# Altium PCB Arduino MEGA blank shield.pcbdoc
Units mm, origin at the board's own origin, x right, y up, seen from the top; angles counter-clockwise.
Board outline 101.6 x 53.34 mm, 2 copper layers (Top Layer, Bottom Layer); 30 components, 91 nets, 145 pads, 2 vias.
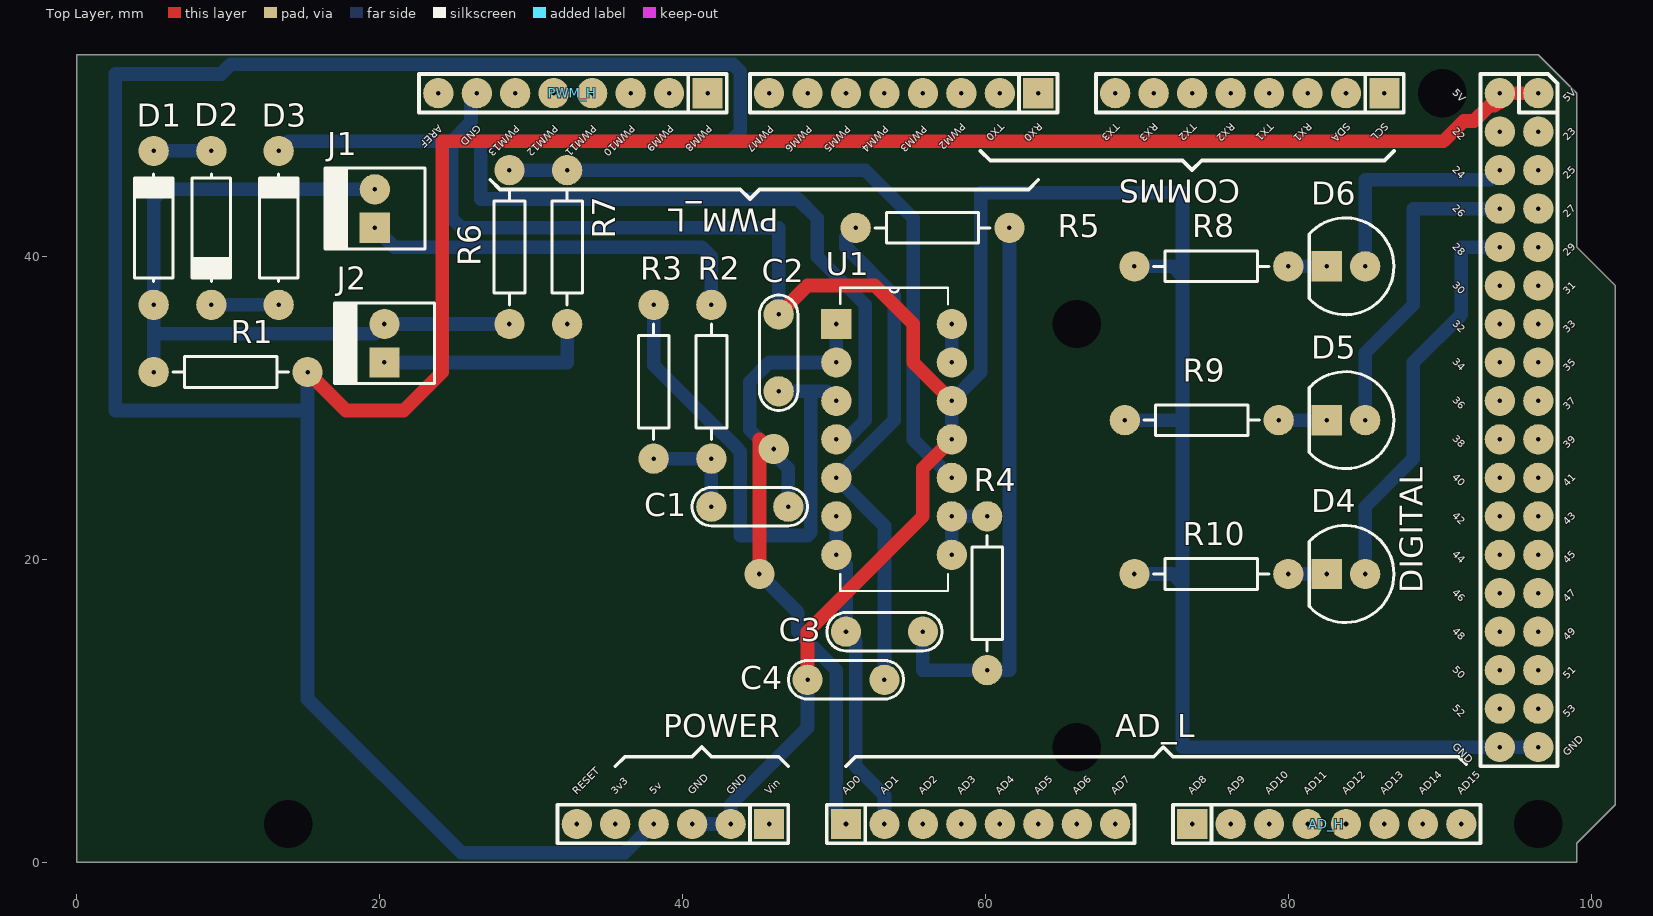
[diagram p0: Top Layer view]
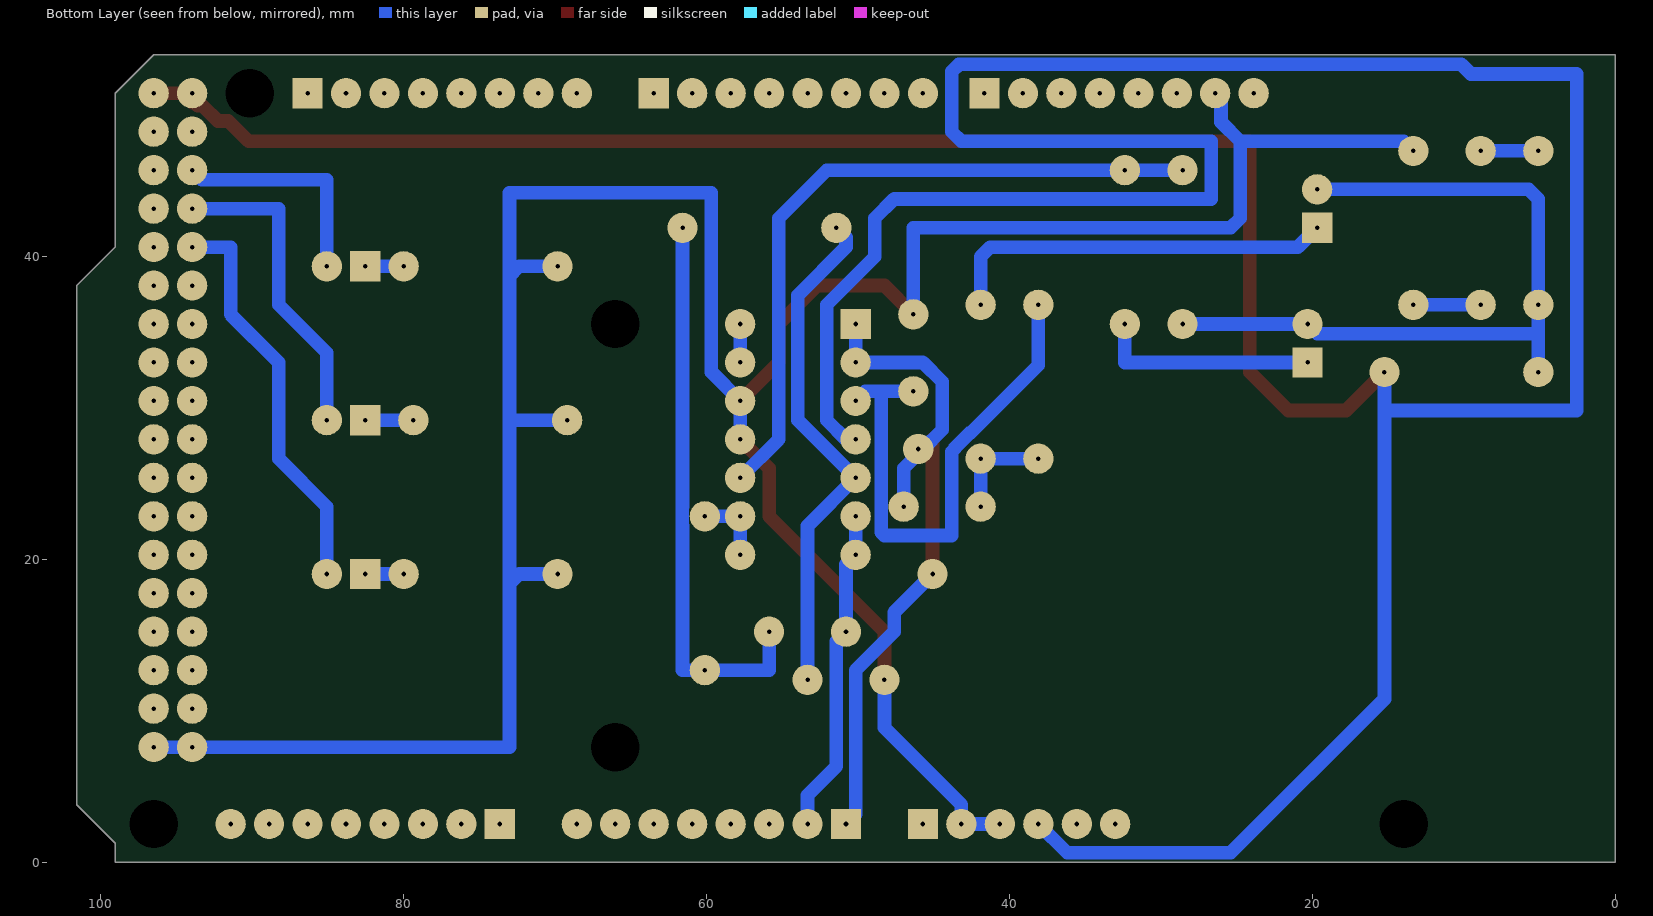
[diagram p1: Bottom Layer view, seen from below]
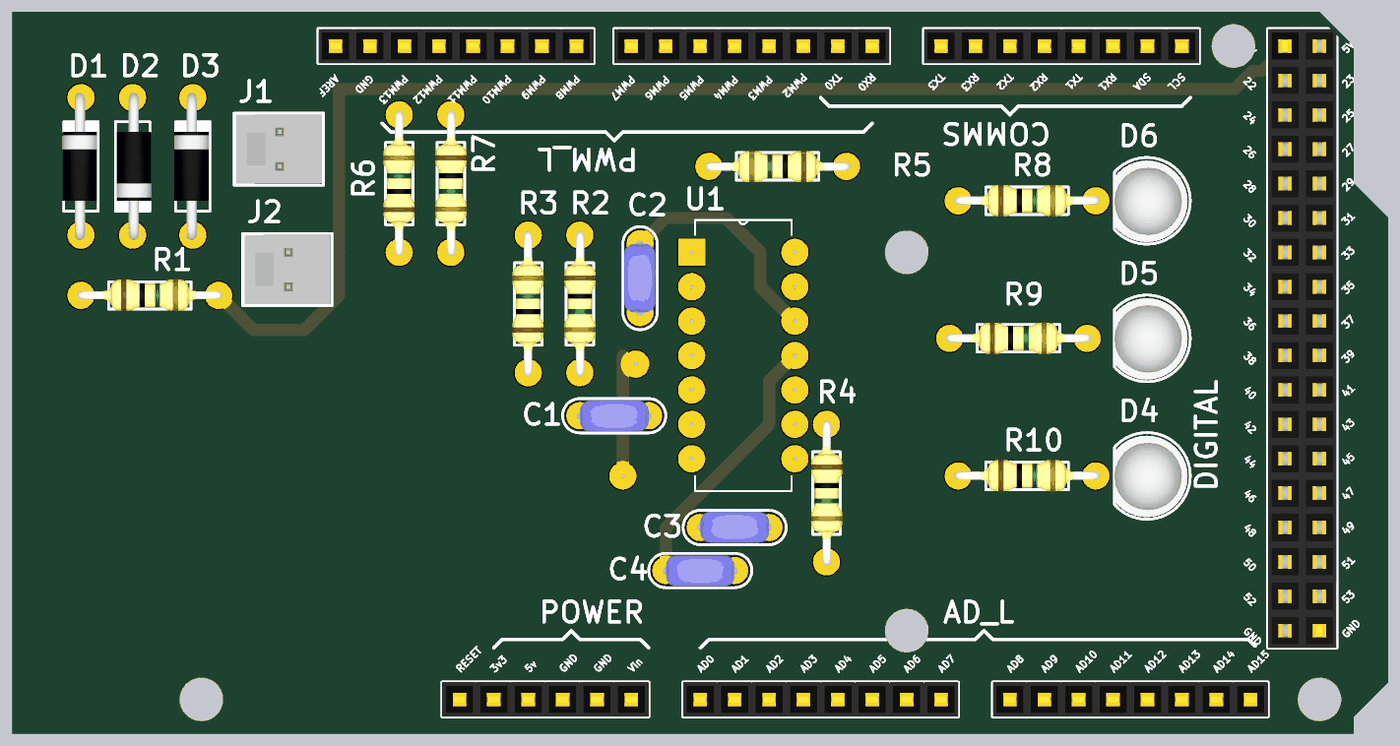
[diagram p2: 3D render of the assembled board from above, using the file's embedded part models]

## Layer stack, top to bottom
Top Solder: solder mask 0.0102, Solder Resist, Dk 3.5
Top Layer: signal copper 0.0356
Dielectric1: dielectric 0.32, FR-4, Dk 4.8
Bottom Layer: signal copper 0.0356
Bottom Solder: solder mask 0.0102, Solder Resist, Dk 3.5

## Board outline
0,0 0,53.34 96.52,53.34 99.06,50.8 99.06,40.64 101.6,38.1 101.6,3.81 99.06,1.27 99.06,0

## Design rules (kind name [scope] priority, off if disabled: settings)
Clearance [All] p1: gap=0.254 ignorepadtopadclearanceinfootprint=FALSE except(0: Arc-Hole Track-Hole SMDPad-Hole THPad-Hole Via-Hole Fill-Hole Poly-Hole Region-Hole Text-Hole)
PolygonConnect [All] p1: connectstyle=Relief reliefconductorwidth=0.254 reliefentries=4 polygonreliefangle="90 Angle" airgapwidth=0.254
RoutingVias [All] p1: holewidth=0.711 width=1.27 viastyle="Through Hole" minholewidth=0.711 minwidth=1.27 maxholewidth=0.711 maxwidth=1.27
SilkToSolderMaskClearance SilkscreenOverComponentPads [IsPad] p1: minsilkscreentomaskgap=0.254 clearancetoexposedcopper=TRUE
SolderMaskExpansion [All] p1: expansion=0.102
Width [All] p1: maxlimit=0.9 minlimit=0.9 preferedwidth=0.9
29 further rules are at their usual default settings.

## Components (designator, comment, footprint, x,y, rotation, side; value= is the part's Value field where it differs from the comment)
AD_H "AD_H" "Header 8x1 8.5mm" 73.66,2.54 r0 top locked
AD_L "AD_L" "Header 8x1 8.5mm" 50.8,2.54 r0 top locked
C1 "220n" CAP200 44.45,23.495 r0 top
C2 "22n" CAP200 46.355,33.655 r270 top
C3 "220n" CAP200 53.34,15.24 r180 top
C4 "22n" CAP200 50.8,12.065 r0 top
COMMS "Communication" "Header 8x1 8.5mm" 86.36,50.8 r180 top
D1 "1n4007" DO41 5.08,41.91 r90 top
D2 "1n4007" DO41 8.89,41.91 r270 top
D3 "1n4007" DO41 13.335,41.91 r90 top
D4 "LED" LED5 83.82,19.05 r180 top
D5 "LED" LED5 83.82,29.21 r180 top
D6 "LED" LED5 83.82,39.37 r180 top
DIGITAL "IO_36" "HEADER 36X 8MM" 96.52,50.8 r270 top locked
J1 "corriente" MOLEX2 19.685,41.91 r90 top
J2 "tension" MOLEX2 20.32,33.02 r90 top
POWER "POWER" "Header 6x1 8.5mm" 45.72,2.54 r180 top locked
PWM_H "PWM_H" "Header 8x1 8.5mm" 41.656,50.8 r180 top locked
PWM_L "PWM_L" "Header 8x1 8.5mm" 63.5,50.8 r180 top locked
R1 "680" RES400 5.08,32.385 r0 top
R2 "1.2k" RES400 41.91,36.83 r270 top
R3 "18k" RES400 38.1,26.67 r90 top
R4 "1.2k" RES400 60.122,22.86 r270 top
R5 "18k" RES400 61.595,41.91 r180 top
R6 "RES" RES400 28.575,35.56 r90 top
R7 "RES" RES400 32.385,45.72 r270 top
R8 "220" RES400 69.85,39.37 r0 top
R9 "220" RES400 69.215,29.21 r0 top
R10 "220" RES400 69.85,19.05 r0 top
U1 "TL084CN" *DIP254P762X510-14 57.785,20.32 r0 top

## Footprints (in the part's own frame and the unit in brackets; to place one, negate y for a bottom-side part, rotate by r counter-clockwise, add the part's x,y. Pads: shape width x height; smd on the part's side, far side on the other; paste and mask are expansions set on the pad)
*DIP254P762X510-14 [mm]
  rect 2x2 hole 0.3: 1(-7.62,15.24)
  round 2 hole 0.3: 2(-7.62,12.7) 3(-7.62,10.16) 4(-7.62,7.62) 5(-7.62,5.08) 6(-7.62,2.54) 7(-7.62,0) 8(0,0) 9(0,2.54) 10(0,5.08) 11(0,7.62) 12(0,10.16) 13(0,12.7) 14(0,15.24)
  silkscreen extent -7.37,-2.39 -0.25,17.63
CAP200 [mm]
  round 2 hole 0.3: 1(-2.54,0) 2(2.54,0)
  silkscreen extent -3.81,-1.27 3.81,1.27, body extent -2.79,-1.17 2.79,1.12, height 6.24
DO41 [mm]
  round 2 hole 0.3: 1(-5.08,0) 2(5.08,0)
  silkscreen extent -3.56,-1.27 3.56,1.27, body extent -5.46,-1.19 5.46,1.37, height 2.03
"Header 6x1 8.5mm" [mm] "Stackable 6 pin header"
  rect 2x2 hole 0.3: 1(0,0)
  round 2 hole 0.3: 2(2.54,0) 3(5.08,0) 4(7.62,0) 5(10.16,0) 6(12.7,0)
  silkscreen extent -1.27,-1.27 13.97,1.27, body extent -1.27,-1.27 13.97,1.27, height 8.5
"Header 8x1 8.5mm" [mm] "Stackable 8 pin header"
  rect 2x2 hole 0.3: 1(0,0)
  round 2 hole 0.3: 2(2.54,0) 3(5.08,0) 4(7.62,0) 5(10.16,0) 6(12.7,0) 7(15.24,0) 8(17.78,0)
  silkscreen extent -1.27,-1.27 19.05,1.27, body extent -1.27,-1.27 19.05,1.27, height 8.5
"HEADER 36X 8MM" [mm] "Stackable 10 pin header"
  round 2 hole 0.3: 1(0,0) 2(0,-2.54) 3(2.54,0) 4(2.54,-2.54) 5(5.08,0) 6(5.08,-2.54) 7(7.62,0) 8(7.62,-2.54) 9(10.16,0) 10(10.16,-2.54) 11(12.7,0) 12(12.7,-2.54) 13(15.24,0) 14(15.24,-2.54) 15(17.78,0) 16(17.78,-2.54) 17(20.32,0) 18(20.32,-2.54) 19(22.86,-2.54) 20(22.86,0) 21(25.4,0) 22(25.4,-2.54) 23(27.94,0) 24(27.94,-2.54) 25(30.48,0) 26(30.48,-2.54) 27(33.02,0) 28(33.02,-2.54) 29(35.56,0) 30(35.56,-2.54) 31(38.1,0) 32(38.1,-2.54) 33(40.64,0) 34(40.64,-2.54) 35(43.18,0) 36(43.18,-2.54)
  silkscreen extent -1.27,-3.81 44.45,1.27, body extent -1.27,-3.81 44.45,1.27, height 8.5
LED5 [mm]
  round 2 hole 0.3: 1(-1.27,0)
  rect 2x2 hole 0.3: 2(1.27,0)
  silkscreen extent -3.16,-3.2 2.43,3.2, body extent -2.96,-2.97 2.46,3.05, height 12.31
MOLEX2 [mm]
  rect 2x2 hole 0.3: 1(0,0)
  round 2 hole 0.3: 2(2.54,0)
  silkscreen extent -1.4,-3.3 3.94,3.3, body extent -1.27,-3.17 3.81,3.18, height 10.74
RES400 [mm]
  round 2 hole 0.3: 1(0,0) 2(10.16,0)
  silkscreen extent 1.27,-1.02 8.89,1.02, body extent -0.3,-1.14 10.46,1.17, height 2.43

## Part data
C1 C2 C3 C4: library part CAP
D1 D2 D3: library part DIODO
J1 J2: library part MOLEX2
R1 R2 R3 R4 R5 R8 R9 R10: library part RES
U1: "J-FET Amplifier 4 Circuit 14-DIP", Package="DIP-14 STMicroelectronics", Availability=Unavailable, MF=STMicroelectronics, MP=TL084CN, Price=None, SnapEDA_Link=https://www.snapeda.com/parts/TL084CN/STMicroelectronics/view-part/1137005/?ref=snap

## Free pads (board coordinates)
  round 1.6 hole 3.2: 0(13.97,2.54) 0(66.04,7.62) 0(66.04,35.56) 0(90.17,50.8) 0(96.52,2.54)

## Via types
v1: diameter 2, hole 0.3, Top Layer to Bottom Layer, 2 vias

## Nets (pads, with @x,y where several pads share a name; then routed paths per layer and width w, separated by ;. In a path a pad name is that pad's centre, name@x,y a point inside that pad or via, vN(x,y) a via of type N, cw(c..) or ccw(c..) an arc to the next point about the centre after c; other vN are vias at no path point)
2.8v: D1.1 J1.2 J2.2 R1.1 R6.1 | length 50.1
  Bottom Layer w0.9: R1.1 5.08,34.925 ; J1.2 5.715,44.45 5.08,43.815 D1.1 5.08,34.925 ; R6.1 J2.2 19.685,34.925 5.08,34.925
3V3: POWER.5
5V: DIGITAL.1 DIGITAL.2 POWER.4 R1.2 U1.4 | length 291.4
  Top Layer w0.9: R1.2 17.78,29.845 21.59,29.845 24.13,32.385 24.13,47.625 90.253,47.625 91.594,48.966 92.276,48.966 93.274,49.964 93.611,49.964 93.812,50.165 93.98,50.165 DIGITAL.2 DIGITAL.1
  Bottom Layer w0.9: R1.2 15.24,29.845 ; POWER.4 36.195,0.635 25.4,0.635 15.24,10.795 15.24,29.845 ; U1.4 50.8,27.94 52.07,29.21 52.07,36.83 48.895,40.005 48.895,42.545 47.625,43.815 26.67,43.815 26.67,47.625 43.18,47.625 43.815,48.26 43.815,52.233 43.343,52.705 10.16,52.705 9.525,52.07 2.54,52.07 2.54,29.845 15.24,29.845
AD0: AD_L.1 C1.2 U1.1 U1.2 | length 47.3
  Top Layer w0.9: v1(45.085,19.05) 45.085,27.94 45.72,27.305 v1(46.038,27.305)
  Bottom Layer w0.9: v1(45.085,19.05) 47.625,16.51 47.625,15.24 50.165,12.7 50.165,3.175 AD_L.1 ; C1.2 46.99,26.035 46.038,26.987 v1(46.038,27.305) 45.72,27.305 44.45,28.575 44.45,31.75 45.72,33.02 U1.2 U1.1
AD1: AD_L.2 C3.2 U1.6 U1.7 | length 21.6
  Bottom Layer w0.9: U1.6 U1.7 50.8,19.685 C3.2 51.435,14.605 51.435,6.35 53.34,4.445 AD_L.2
AD2: AD_L.3
AD3: AD_L.4
AD4: AD_L.5
AD5: AD_L.6
AD6: AD_L.7
AD7: AD_L.8
AD8: AD_H.1
AD9: AD_H.2
AD10: AD_H.3
AD11: AD_H.4
AD12: AD_H.5
AD13: AD_H.6
AD14: AD_H.7
AD15: AD_H.8
AREF: PWM_H.8
bufferVOffes: R6.2 R7.1 U1.10 | length 46.2
  Bottom Layer w0.9: R6.2 R7.1 52.07,45.72 55.245,42.545 55.245,27.94 U1.10
GND: C2.1 C4.1 D3.2 DIGITAL.35 DIGITAL.36 POWER.2 POWER.3 PWM_H.7 R8.1 R9.1 R10.1 U1.11 U1.12 | length 200.3
  Top Layer w0.9: C2.1 48.26,38.1 52.705,38.1 55.245,35.56 55.245,33.02 U1.12 ; C4.1 48.26,15.24 55.88,22.86 55.88,26.035 U1.11
  Bottom Layer w0.9: D3.2 13.97,47.625 24.765,47.625 ; PWM_H.7 26.035,50.419 26.035,48.895 24.765,47.625 ; POWER.3 POWER.2 43.18,3.81 48.26,8.89 C4.1 ; C2.1 46.355,41.91 25.4,41.91 24.765,42.545 24.765,47.625 ; U1.11 U1.12 59.69,32.385 59.69,44.229 73.025,44.229 73.025,38.735 ; R9.1 73.025,29.21 ; R10.1 72.39,19.05 73.025,18.415 ; R8.1 72.39,39.37 73.025,38.735 ; DIGITAL.35 DIGITAL.36 73.025,7.62 73.025,18.415 ; 73.025,18.415 73.025,29.21 ; 73.025,29.21 73.025,38.735
i+2.8: J1.1 R2.1 | length 26.2
  Bottom Layer w0.9: J1.1 20.955,40.64 41.275,40.64 41.91,40.005 R2.1
IO22: DIGITAL.3
IO23: DIGITAL.4
IO24: DIGITAL.5
IO25: D6.1 DIGITAL.6 | length 14.9
  Bottom Layer w0.9: D6.1 85.09,45.085 93.345,45.085 DIGITAL.6
IO26: DIGITAL.7
IO27: D5.1 DIGITAL.8 | length 21
  Bottom Layer w0.9: D5.1 85.09,33.655 88.265,36.83 88.265,43.18 DIGITAL.8
IO28: DIGITAL.9
IO29: D4.1 DIGITAL.10 | length 26.8
  Bottom Layer w0.9: D4.1 85.09,23.495 88.265,26.67 88.265,33.02 91.44,36.195 91.44,40.64 DIGITAL.10
IO30: DIGITAL.11
IO31: DIGITAL.12
IO32: DIGITAL.13
IO33: DIGITAL.14
IO34: DIGITAL.15
IO35: DIGITAL.16
IO36: DIGITAL.17
IO37: DIGITAL.18
IO38: DIGITAL.19
IO39: DIGITAL.20
IO40: DIGITAL.21
IO41: DIGITAL.22
IO42: DIGITAL.23
IO43: DIGITAL.24
IO44: DIGITAL.25
IO45: DIGITAL.26
IO46: DIGITAL.27
IO47: DIGITAL.28
IO48: DIGITAL.29
IO49: DIGITAL.30
IO50: DIGITAL.31
IO51: DIGITAL.32
IO52: DIGITAL.33
IO53: DIGITAL.34
NetC1_1: C1.1 R2.2 R3.1 | length 7
  Bottom Layer w0.9: R3.1 R2.2 C1.1
NetC2_2: C2.2 R3.2 U1.3 | length 35.9
  Bottom Layer w0.9: R3.2 38.1,32.833 42.559,28.374 42.616,28.374 43.614,27.376 43.614,27.319 43.815,27.118 43.815,21.59 48.26,21.59 48.481,21.811 48.481,30.894 48.26,31.115 ; C2.2 48.26,31.115 ; U1.3 49.53,31.115 48.26,31.115
NetC3_1: C3.1 R4.2 R5.1 | length 37.5
  Bottom Layer w0.9: C3.1 55.88,12.7 R4.2 61.595,12.7 61.595,22.224 61.613,22.242 61.613,23.478 61.595,23.496 R5.1
NetC4_2: C4.2 R5.2 U1.5 | length 34.3
  Bottom Layer w0.9: R5.2 50.8,41.275 50.8,40.64 53.975,37.465 53.975,29.21 U1.5 53.34,22.225 C4.2
NetD1_2: D1.2 D2.1 | length 3.8
  Bottom Layer w0.9: D1.2 D2.1
NetD2_2: D2.2 D3.1 | length 4.4
  Bottom Layer w0.9: D2.2 D3.1
NetD4_2: D4.2 R10.2 | length 2.5
  Bottom Layer w0.9: R10.2 D4.2
NetD5_2: D5.2 R9.2 | length 3.2
  Bottom Layer w0.9: R9.2 D5.2
NetD6_2: D6.2 R8.2 | length 2.5
  Bottom Layer w0.9: R8.2 D6.2
NetJ2_1: J2.1 R7.2 | length 14.6
  Bottom Layer w0.9: J2.1 32.385,33.02 R7.2
NetU1_13: U1.13 U1.14 | length 2.5
  Bottom Layer w0.9: U1.13 U1.14
PWM2: PWM_L.3
PWM3: PWM_L.4
PWM4: PWM_L.5
PWM5: PWM_L.6
PWM6: PWM_L.7
PWM7: PWM_L.8
PWM8: PWM_H.1
PWM9: PWM_H.2
PWM10: PWM_H.3
PWM11: PWM_H.4
PWM12: PWM_H.5
PWM13: PWM_H.6
RESET: POWER.6
RX0: PWM_L.1
RX1: COMMS.3
RX2: COMMS.5
RX3: COMMS.7
SCL: COMMS.1
SDA: COMMS.2
TX0: PWM_L.2
TX1: COMMS.4
TX2: COMMS.6
TX3: COMMS.8
v+2.8: R4.1 U1.8 U1.9 | length 4.9
  Bottom Layer w0.9: U1.8 U1.9 R4.1
VIN: POWER.1

## Silkscreen, mask and mechanical layers (free items; w line width, h text height)
Top Overlay:
  lines w0.254: 27.305,45.085 27.94,44.45 43.815,44.45 44.45,43.815 45.085,44.45 62.865,44.45 63.5,45.085 ; 35.56,6.35 36.195,6.985 40.64,6.985 41.275,7.62 41.91,6.985 46.355,6.985 46.99,6.35 ; 50.8,6.35 51.435,6.985 71.12,6.985 71.755,7.62 72.39,6.985 91.26,6.985 91.763,6.483 ; 59.69,46.99 60.325,46.355 73.025,46.355 73.66,45.72 74.295,46.355 86.36,46.355 86.995,46.99
  text "5V" at 90.805,50.8 h0.51 r315
  text "5V" at 98.425,50.165 h0.51 r45
  text "PWM2" at 58.42,48.895 h0.51 r225
  text "TX0" at 60.96,48.895 h0.51 r225
  text "RX0" at 63.5,48.895 h0.51 r225
  text "TX3" at 68.58,48.895 h0.51 r225
  text "RX3" at 71.12,48.895 h0.51 r225
  text "TX2" at 73.66,48.895 h0.51 r225
  text "RX2" at 76.2,48.895 h0.51 r225
  text "TX1" at 78.74,48.895 h0.51 r225
  text "RX1" at 81.28,48.895 h0.51 r225
  text "SDA" at 83.82,48.895 h0.51 r225
  text "SCL" at 86.36,48.895 h0.51 r225
  text "AREF" at 23.876,48.768 h0.51 r225
  text "GND" at 26.416,48.768 h0.51 r225
  text "PWM13" at 28.956,48.768 h0.51 r225
  text "PWM12" at 31.496,48.768 h0.51 r225
  text "PWM11" at 34.036,48.768 h0.51 r225
  text "PWM10" at 36.576,48.768 h0.51 r225
  text "PWM9" at 39.116,48.768 h0.51 r225
  text "PWM8" at 41.656,48.768 h0.51 r225
  text "PWM7" at 45.72,48.715 h0.51 r225
  text "PWM6" at 48.26,48.715 h0.51 r225
  text "PWM5" at 50.8,48.715 h0.51 r225
  text "PWM4" at 53.34,48.715 h0.51 r225
  text "PWM3" at 55.88,48.715 h0.51 r225
  text "22" at 90.805,48.26 h0.51 r315
  text "23" at 98.425,47.625 h0.51 r45
  text "24" at 90.805,45.72 h0.51 r315
  text "25" at 98.425,45.085 h0.51 r45
  text "26" at 90.805,43.18 h0.51 r315
  text "27" at 98.425,42.545 h0.51 r45
  text "28" at 90.805,40.64 h0.51 r315
  text "29" at 98.425,40.005 h0.51 r45
  text "30" at 90.805,38.1 h0.51 r315
  text "31" at 98.425,37.465 h0.51 r45
  text "32" at 90.805,35.56 h0.51 r315
  text "33" at 98.425,34.925 h0.51 r45
  text "34" at 90.805,33.02 h0.51 r315
  text "35" at 98.425,32.385 h0.51 r45
  text "36" at 90.805,30.48 h0.51 r315
  text "37" at 98.425,29.845 h0.51 r45
  text "38" at 90.805,27.94 h0.51 r315
  text "39" at 98.425,27.305 h0.51 r45
  text "40" at 90.805,25.4 h0.51 r315
  text "41" at 98.425,24.765 h0.51 r45
  text "42" at 90.805,22.86 h0.51 r315
  text "43" at 98.425,22.225 h0.51 r45
  text "44" at 90.805,20.32 h0.51 r315
  text "45" at 98.425,19.685 h0.51 r45
  text "46" at 90.805,17.78 h0.51 r315
  text "47" at 98.425,17.145 h0.51 r45
  text "48" at 90.805,15.24 h0.51 r315
  text "49" at 98.425,14.605 h0.51 r45
  text "50" at 90.805,12.7 h0.51 r315
  text "51" at 98.425,12.065 h0.51 r45
  text "52" at 90.805,10.16 h0.51 r315
  text "53" at 98.425,9.525 h0.51 r45
  text "GND" at 90.805,7.62 h0.51 r315
  text "GND" at 98.425,6.985 h0.51 r45
  text "RESET" at 33.02,4.445 h0.51 r45
  text "3v3" at 35.56,4.445 h0.51 r45
  text "5v" at 38.1,4.445 h0.51 r45
  text "GND" at 40.64,4.445 h0.51 r45
  text "GND" at 43.18,4.445 h0.51 r45
  text "Vin" at 45.72,4.445 h0.51 r45
  text "AD0" at 50.8,4.445 h0.51 r45
  text "AD1" at 53.34,4.445 h0.51 r45
  text "AD2" at 55.88,4.445 h0.51 r45
  text "AD3" at 58.42,4.445 h0.51 r45
  text "AD4" at 60.96,4.445 h0.51 r45
  text "AD5" at 63.5,4.445 h0.51 r45
  text "AD6" at 66.04,4.445 h0.51 r45
  text "AD7" at 68.58,4.445 h0.51 r45
  text "AD8" at 73.66,4.445 h0.51 r45
  text "AD9" at 76.2,4.445 h0.51 r45
  text "AD10" at 78.74,4.445 h0.51 r45
  text "AD11" at 81.28,4.445 h0.51 r45
  text "AD12" at 83.82,4.445 h0.51 r45
  text "AD13" at 86.36,4.445 h0.51 r45
  text "AD14" at 88.9,4.445 h0.51 r45
  text "AD15" at 91.44,4.445 h0.51 r45
Mechanical 1:
  circle w0.127: c96.52,2.54 r1.6
  circle w0.127: c90.17,50.8 r1.6
  circle w0.127: c13.97,2.54 r1.6
  circle w0.127: c66.04,7.62 r1.6
  lines w0.127: 0,0 0,53.34 96.52,53.34 99.06,50.8 99.06,40.64 101.6,38.1 101.6,3.81 99.06,1.27 99.06,0 0,0